# Altium PCB PCB1.PcbDoc (part 4 of 5)
Units mm, origin at the board's own origin, x right, y up, seen from the top; angles counter-clockwise.
Board outline 160 x 110 mm, 4 copper layers (Top Layer, Power Layer, GND Layer, Bottom Layer), stack 1.714 mm thick; 504 components, 362 nets, 1765 pads, 999 vias.
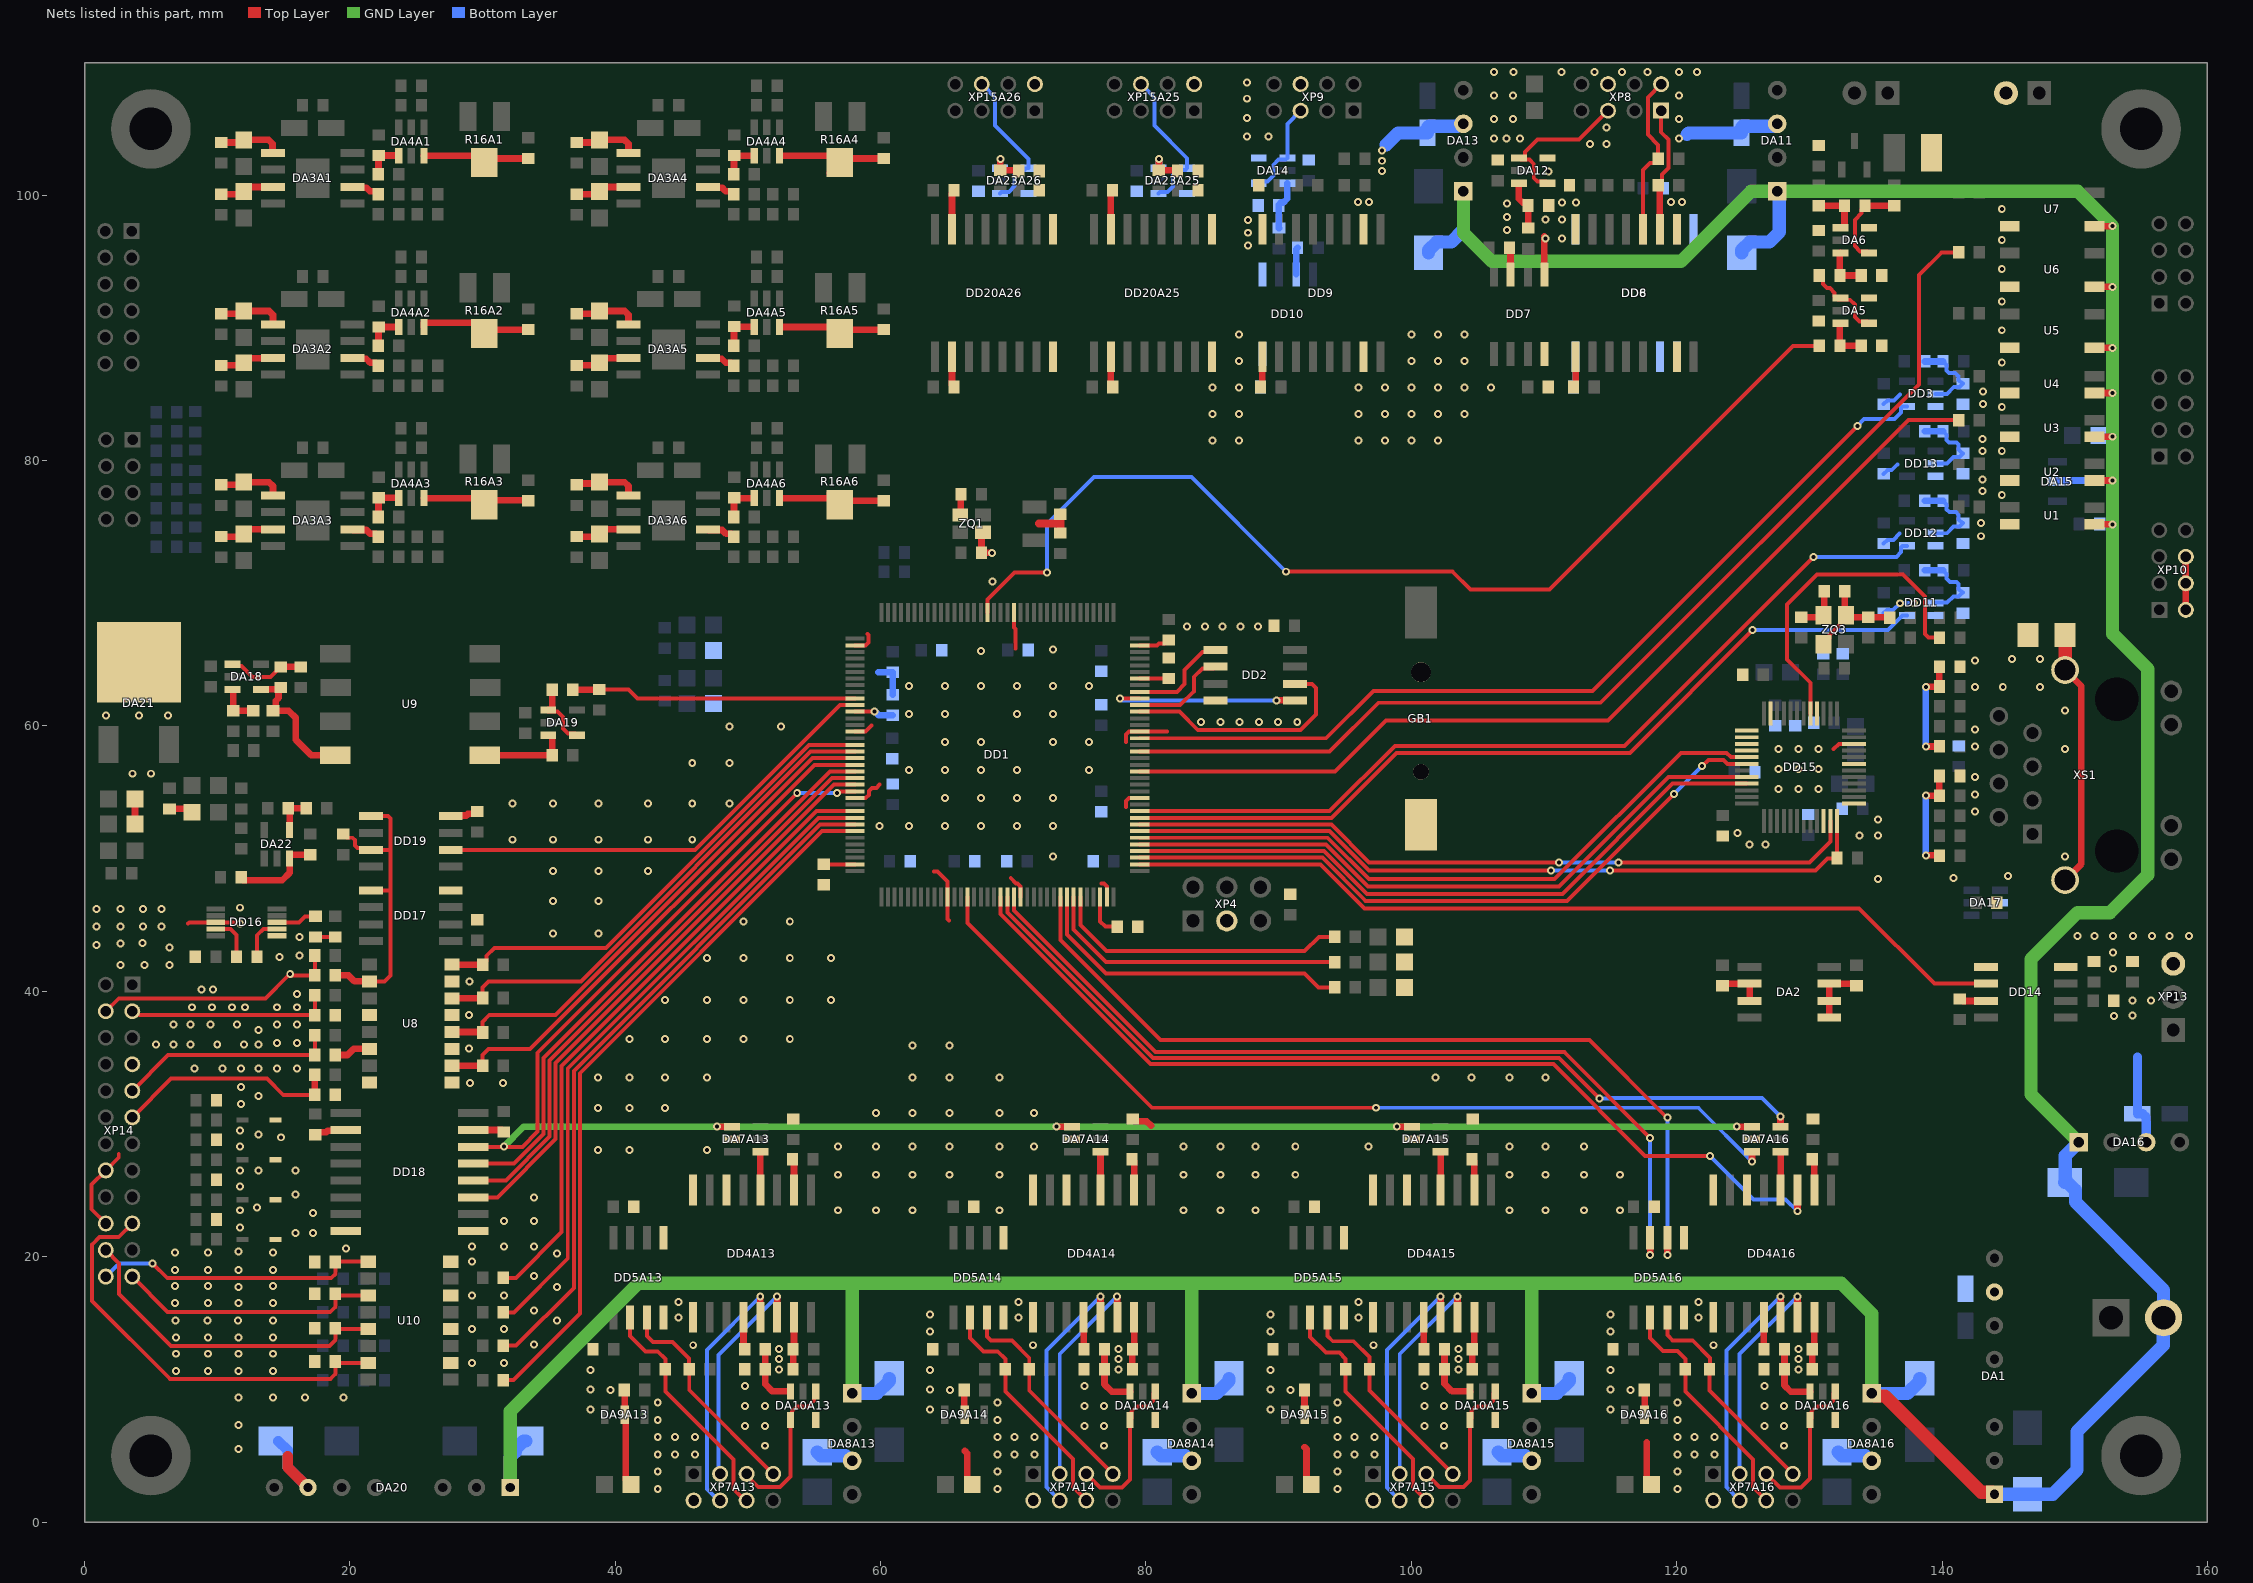
[diagram p5: the nets of this part, all layers, seen from the top]

## Via types
v1: diameter 0.6, hole 0.3, Top Layer to Bottom Layer, tented both sides, 927 vias
v2: diameter 0.6, hole 0.3, Top Layer to Bottom Layer, 72 vias

## Nets (pads, with @x,y where several pads share a name; then routed paths per layer and width w, separated by ;. In a path a pad name is that pad's centre, name@x,y a point inside that pad or via, vN(x,y) a via of type N, cw(c..) or ccw(c..) an arc to the next point about the centre after c; other vN are vias at no path point) (continued)
DRV4_DIG_MOD: DA7A16.3 DD1.86 | length 69.3
  Top Layer w0.3: DD1.86@66.55,47.1 66.55,45.136 80.461,31.225 v1(97.35,31.225)
  Top Layer w0.5: v1(125.675,27.175) DA7A16.3@125.675,27.9
  Bottom Layer w0.3: v1(97.35,31.225) 121.625,31.225 v1(125.675,27.175)
DRV4_ERR1: DD1.93 DD5A16.7 | length 66.2
  Top Layer w0.3: DD1.93@70.05,47.1 70.05,46.091 80.716,35.425 111.525,35.425 v1(118,28.95)
  Top Layer w0.5: v1(118,20.125) DD5A16.7@118,21.425
  Bottom Layer w0.3: v1(118,20.125) v1(118,28.95)
DRV4_ERR2: DD1.100 DD5A16.6 | length 66.2
  Top Layer w0.3: DD1.100@73.55,47.1 73.55,43.864 81.089,36.325 113.425,36.325 119.25,30.5 v1(119.3,30.5)
  Top Layer w0.5: v1(119.3,20.125) DD5A16.6@119.3,21.425
  Bottom Layer w0.3: v1(119.3,20.125) v1(119.3,30.5)
DRV4_ON: DD1.91 DD4A16.3 | length 72.2
  Top Layer w0.3: DD1.91@69.05,47.1 69.05,45.818 80.343,34.525 110.7,34.525 117.625,27.6 v1(122.5,27.6)
  Top Layer w0.5: v1(129.1,23.425) 129.103,23.427 129.103,25.023 DD4A16.3@129.105,25.025
  Bottom Layer w0.3: v1(122.5,27.6) 125.775,24.325 128.2,24.325 v1(129.1,23.425)
DRV4_SEL_MOD: DA7A16.6 DD1.92 | length 66.6
  Top Layer w0.3: DD1.92@69.55,47.1 69.55,45.955 80.53,34.975 111.126,34.975 v1(114.188,31.913)
  Top Layer w0.5: DA7A16.6@127.825,29.8 v1(127.825,30.575)
  Bottom Layer w0.3: v1(114.188,31.913) 115.026,31.913 115.088,31.975 126.425,31.975 v1(127.825,30.575)
EMER_BUT: DD1.117 DD11.4 | length 64.1
  Top Layer w0.3: DD1.117@79.525,53.075 93.975,53.075 98.875,57.975 116.475,57.975 v1(125.725,67.225)
  Bottom Layer w0.3: v1(125.725,67.225) 135.925,67.225 137.025,68.325 DD11.4@137.35,68.325
EMIS_COL: DD1.127 R51.2 | length 82.1
  Top Layer w0.3: DD1.127@79.525,58.075 93.848,58.075 97.523,61.75 114.266,61.75 138.254,85.738 138.254,93.979 139.975,95.7 R51.2@141.25,95.7
EMIS_IND: DD1.124 R48.2 | length 72.7
  Top Layer w0.3: DD1.124@79.525,56.575 94.257,56.575 98.082,60.4 114.836,60.4 137.486,83.05 R48.2@141.25,83.05
ETH_CS: DD1.114 DD15.29 | length 51.1
  Top Layer w0.3: DD1.114@79.525,51.575 93.696,51.575 96.821,48.45 110.8,48.45 120.325,57.975 123.75,57.975 124.075,57.65 DD15.29@125.275,57.65
ETH_INT: DD1.116 DD15.47 | length 55.4
  Top Layer w0.3: DD1.116@79.525,52.575 93.975,52.575 96.825,49.725 v1(111.125,49.725) ; v1(115.6,49.725) 130.025,49.725 131.575,51.275 DD15.47@131.575,52.85
  Bottom Layer w0.3: v1(111.125,49.725) v1(115.6,49.725)
ETH_MISO: DD1.112 DD15.33 | length 50.5
  Top Layer w0.3: DD1.112@79.525,50.575 93.423,50.575 96.648,47.35 111.4,47.35 119.7,55.65 DD15.33@125.275,55.65
ETH_MOSI: DD1.113 DD15.32 | length 50.5
  Top Layer w0.3: DD1.113@79.525,51.075 93.559,51.075 96.734,47.9 111.125,47.9 119.375,56.15 DD15.32@125.275,56.15
ETH_RST: DD1.115 DD15.48 R68.1 | length 57
  Top Layer w0.3: DD1.115@79.525,52.075 93.839,52.075 96.814,49.1 v1(110.525,49.1) ; v1(114.988,49.113) 130.463,49.113 131.376,50.026 132.051,50.026 R68.1@132.075,50.05 132.075,52.1 DD15.48@132.075,52.85
  Bottom Layer w0.3: v1(110.525,49.1) v1@114.975,49.1
ETH_SCLK: DD1.111 DD15.30 | length 51.6
  Top Layer w0.3: DD1.111@79.525,50.075 93.286,50.075 96.561,46.8 111.725,46.8 v1(119.8,54.875) ; v1(121.912,56.975) 122.387,57.45 123.524,57.45 123.824,57.15 DD15.30@125.275,57.15
  Bottom Layer w0.3: v1(119.8,54.875) 119.813,54.875 v1(121.912,56.975)
EXT_AN_MOD: C113.1 DD1.46 R95.2 | length 21.5
  Top Layer w0.3: C113.1@38.8,62.75 41,62.75 41.675,62.075 DD1.46@58.075,62.075
  Top Layer w0.5: R95.2@36.8,62.725 C113.1@38.775,62.725
EXT_COM1: DD1.57 DD18.13 | length 44.4
  Top Layer w0.3: DD18.13@29.3,27.01 32.377,27.01 34.601,29.234 34.601,34.976 56.2,56.575 DD1.57@58.075,56.575
EXT_COM2: DD1.58 DD18.12 | length 44.7
  Top Layer w0.3: DD18.12@29.3,25.74 31.749,25.74 35.055,29.046 35.055,34.794 56.336,56.075 DD1.58@58.075,56.075
EXT_COM3: DD1.59 DD18.11 | length 45
  Top Layer w0.3: DD18.11@29.3,24.47 31.121,24.47 35.509,28.858 35.509,34.584 56.5,55.575 DD1.59@58.075,55.575
EXT_DIG_MOD: DA7A13.1 DA7A14.1 DA7A15.1 DA7A16.1 DD1.60 DD18.14 | length 141.5
  Top Layer w0.3: DD18.14@29.3,28.28 33.005,28.28 34.147,29.422 34.147,35.371 v1(53.713,54.937) ; v1(56.712,54.938) 56.793,54.938 56.93,55.075 DD1.60@58.075,55.075
  Top Layer w0.5: v1(47.65,29.8) DA7A13.1@48.8,29.8 ; v1(73.25,29.8) DA7A14.1@74.425,29.8 ; v1(98.9,29.8) DA7A15.1@100.05,29.8 ; v1(124.525,29.8) DA7A16.1@125.675,29.8
  GND Layer w0.5: v1(31.6,28.3) 33.1,29.8 v1(124.525,29.8)
  Bottom Layer w0.3: v1(53.713,54.937) v1(56.712,54.938)
EXT_FLAG1: DD1.66 R96.2 | length 54.3
  Top Layer w0.3: R96.2@31.55,10.7 32.325,10.7 37.325,15.7 37.325,33.825 55.575,52.075 DD1.66@58.075,52.075
EXT_FLAG2: DD1.65 R97.2 | length 52.4
  Top Layer w0.3: R97.2@31.55,13.3 32.525,13.3 36.871,17.646 36.871,34.007 55.439,52.575 DD1.65@58.075,52.575
EXT_FLAG3: DD1.64 R98.2 | length 50.4
  Top Layer w0.3: R98.2@31.55,15.8 32.356,15.8 36.417,19.861 36.417,34.19 55.302,53.075 DD1.64@58.075,53.075
EXT_FLAG4: DD1.63 R99.2 | length 48.4
  Top Layer w0.3: R99.2@31.55,18.4 32.5,18.4 35.963,21.863 35.963,34.372 55.166,53.575 DD1.63@58.075,53.575
EXT_IL1: DD1.53 R89.2 U8.16 | length 37.5
  Top Layer w0.3: U8.16@27.7,42.01 U8.16@27.71,42 ; R89.2@30,42 30.275,42.275 30.275,42.65 30.906,43.281 39.3,43.281 54.594,58.575 DD1.53@58.075,58.575
  Top Layer w0.5: U8.16@27.71,42 R89.2@30,42
EXT_IL2: DD1.54 R91.2 U8.14 | length 38.6
  Top Layer w0.3: R91.2@29.97,39.47 R91.2@30,39.5 30,40.3 30.45,40.75 37.405,40.75 54.73,58.075 DD1.54@58.075,58.075
  Top Layer w0.5: U8.14@27.7,39.47 R91.2@29.97,39.47
EXT_KEY: DD1.55 R92.2 U8.12 | length 39.4
  Top Layer w0.3: R92.2@29.97,36.93 R92.2@30,36.9 30,37.7 30.5,38.2 35.492,38.2 54.867,57.575 DD1.55@58.075,57.575
  Top Layer w0.5: U8.12@27.7,36.93 R92.2@29.97,36.93
EXT_MP_EN: DD1.56 R93.2 U8.10 | length 40.2
  Top Layer w0.3: R93.2@29.99,34.39 R93.2@30,34.4 30,35.2 30.45,35.65 33.578,35.65 55.003,57.075 DD1.56@58.075,57.075
  Top Layer w0.5: U8.10@27.7,34.39 R93.2@29.99,34.39
EXT_PMO: DD1.47 DD19.2 | length 35
  Top Layer w0.3: DD19.2@27.6,50.65 46.025,50.65 56.95,61.575 DD1.47@58.075,61.575
FIBER_IL: DD1.129 DD3.4 | length 68.4
  Top Layer w0.3: DD1.129@79.525,59.075 93.575,59.075 97.15,62.65 113.65,62.65 v1(133.625,82.625)
  Bottom Layer w0.3: v1(133.625,82.625) 134.125,83.125 136.4,83.125 136.9,83.625 136.9,83.95 137.025,84.075 DD3.4@137.35,84.075
FLAG1_HW: R112.2 U10.15 XP14.19 | length 32.3
  Top Layer w0.3: XP14.19@3.6,22.5 2.575,21.475 1.125,21.475 0.55,20.9 0.55,16.675 6.427,10.798 18.523,10.798 18.9,11.175 R112.2@18.9,12.1 19,12 U10.15@21.38,12
FLAG2_HW: R113.2 U10.13 XP14.22 | length 25.2
  Top Layer w0.3: XP14.22@1.6,20.5 2.6,19.5 2.6,17.2 6.516,13.284 18.459,13.284 18.9,13.725 R113.2@18.9,14.6 18.96,14.54 U10.13@21.38,14.54
FLAG3_HW: R115.2 U10.11 XP14.23 | length 19.9
  Top Layer w0.3: XP14.23@3.6,18.5 6.26,15.84 18.515,15.84 18.9,16.225 R115.2@18.9,17.08 ; R115.2@18.9,17.2 19.02,17.08 U10.11@21.38,17.08
FLAG4_HW: R116.2 U10.9 XP14.24 | length 21.7
  Top Layer w0.3: v1(5.125,19.5) 6.25,18.375 18.575,18.375 18.9,18.7 R116.2@18.9,19.6 ; R116.2@18.92,19.62 U10.9@21.38,19.62
  Bottom Layer w0.3: XP14.24@1.6,18.5 2.6,19.5 v1(5.125,19.5)
FLOW: DD1.110 DD14.6 | length 67.5
  Top Layer w0.3: DD1.110@79.525,49.575 93.15,49.575 96.475,46.25 133.75,46.25 139.425,40.575 DD14.6@143.325,40.575
GND: C2.2 C4.2 C5.2 C6.2 C7.2 C9.2 C10.1 C12.2 C13.2 C15.2 C16.1 C17.2 C18.2 C19.2 C20.2 C21.1 C22.1 C23.1 C24.2 C25.2 C26.1 C27.2 C28.2 C38.2 C39.2 C40.2 C42.2 C43.2 C45A13.2 C45A14.2 C45A15.2 C45A16.2 C46A13.2 C46A14.2 C46A15.2 C46A16.2 C47A13.2 C47A14.2 C47A15.2 C47A16.2 C56.2 C57.2 C58.2 C66.2 C67.2 C75.2 C76.2 C77.2 C78.2 C79.2 C80.2 C85.2 C86.2 C87.2 C88.2 C89.2 C90.2 C91.2 C92.2 C93.2 C94.2 C95.2 C96.2 C97.2 C98.2 C99.2 C100.2 C101.2 C102.2 C110.2 C111.2 C114.2 C124A25.2 C124A26.2 DA1.7 DA2.2 DA2.3 DA2.5 DA2.6 DA2.7 DA5.5 DA6.5 DA7A13.2 DA7A14.2 DA7A15.2 DA7A16.2 DA17.2 DD1.16 DD1.38 DD1.51 DD1.61 DD1.83 DD1.94 DD1.107 DD1.120 DD1.130 DD2.4 DD3.3 DD4A13.2 DD4A13.6 DD4A13.8 DD4A14.2 DD4A14.6 DD4A14.8 DD4A15.2 DD4A15.6 DD4A15.8 DD4A16.2 DD4A16.6 DD4A16.8 DD5A13.5 DD5A14.5 DD5A15.5 DD5A16.5 DD6.9 DD6.15 DD7.4 DD8.2 DD8.3 DD8.8 DD9.9 DD9.15 DD10.4 DD11.3 DD12.3 DD13.3 DD14.5 DD14.7 DD15.1 DD15.7 DD15.10 DD15.16 DD15.23 DD15.25 DD15.26 DD15.27 DD15.28 DD15.46 DD17.4 DD18.9 DD18.15 DD19.4 DD20A25.2 DD20A25.8 DD20A26.2 DD20A26.8 GB1.1 R1.1 R2.1 R3.2 R7.2 R21.2 R24.1 R25.1 R64.1 U1.2 U2.2 U3.2 U4.2 U5.3 U6.3 U7.3 U8.9 U8.11 U8.13 U8.15 U10.2 U10.4 U10.6 U10.8 VD1.2 VD2.2 VD3.2 XP4.3 XP6.2 XP10.2 XP10.4 XP10.6 ZQ1.2 ZQ1.4 ZQ3.2 ZQ3.4 | length 88.9
  Top Layer w0.3: DD1.61@58.075,54.575 58.874,54.575 59.113,54.813 59.113,55.087 59.351,55.325 59.675,55.325 59.925,55.575 ; DD1.51@58.075,59.575 58.874,59.575 59.325,60.026 59.325,60.05 ; DD1.38@58.075,66.075 58.874,66.075 59.1,66.301 59.1,66.849 59.012,66.937 ; 64.002,49.025 64.299,49.025 65.05,48.274 DD1.83@65.05,47.1 65.05,45.45 65.15,45.35 ; ZQ1.4@66,75.9 ZQ1.4@66.05,75.95 ; ZQ1.2@67.6,74.5 ZQ1.2@67.7,74.6 ; 69.806,48.529 70.21,48.125 70.324,48.125 70.55,47.899 DD1.94@70.55,47.1 ; DD1.16@70.05,68.55 70.05,67.424 70.15,67.324 70.15,65.825 ; 76.65,48.125 76.824,48.125 77.05,47.899 DD1.107@77.05,47.1 ; 78.5,53.9 78.5,54.349 78.726,54.575 DD1.120@79.525,54.575 ; 78.5,58.775 78.5,59.349 78.726,59.575 DD1.130@79.525,59.575 81.6,59.575 ; ZQ3.4@131.05,66.15 131.5,66.6 131.5,66.85 132.3,67.65 132.3,67.9 ZQ3.2@132.75,68.35 ; 131.825,58.25 132.225,58.65 DD15.10@133.375,58.65 ; ZQ3.2@132.675,68.425 ZQ3.2@132.75,68.35 ; ZQ3.2@132.9,68.2 ZQ3.2@132.75,68.35 ; R64.1@136.012,68.2 R64.1@136.05,68.162
  Top Layer w0.5: DD19.4@27.6,53.2 27.65,53.25 28.775,53.25 28.9,53.375 29.425,53.375 C114.2@29.6,53.55 ; DD18.15@29.3,29.55 31.45,29.55 C111.2@31.6,29.4 ; C46A13.2@53.225,27.2 53.395,27.2 53.47,27.125 DD4A13.2@53.47,25.025 ; DD20A26.2@65.38,87.825 65.38,85.695 C124A26.2@65.525,85.55 ; ZQ1.4@66.05,75.95 C12.2@66.05,77.45 ; ZQ1.2@67.6,74.5 C6.2@67.6,73.05 v1(68.4,73.05) ; DD20A25.2@77.345,87.825 77.345,85.705 C124A25.2@77.5,85.55 ; C46A14.2@78.95,27.35 79.105,27.195 DD4A14.2@79.105,25.025 ; C45A14.2@79,30.375 79.175,30.2 80.05,30.2 80.375,29.875 ; C67.2@88.625,85.55 88.77,85.695 DD9.9@88.77,87.828 ; C46A15.2@104.575,27.35 104.745,27.18 DD4A15.2@104.745,25.025 ; C57.2@112.225,85.55 112.385,85.71 DD6.9@112.385,87.828 ; C9.2@123.45,40.425 123.601,40.576 DA2.2@125.5,40.576 DA2.3@125.5,39.276 ; C46A16.2@130.225,27.35 130.375,27.2 DD4A16.2@130.375,25.025 ; DA2.5@131.5,38.026 DA2.6@131.5,39.276 DA2.7@131.5,40.576 133.474,40.576 C4.2@133.575,40.475 ; ZQ3.2@132.675,68.425 C94.2@132.675,70.15 ; ZQ3.2@132.9,68.2 C92.2@134.45,68.2 R64.1@136.012,68.2 ; C85.2@141.325,39.55 141.6,39.275 DD14.7@143.325,39.275 ; XP10.2@158.375,68.75 XP10.4@158.375,70.75 XP10.6@158.375,72.75
  Top Layer w0.6: 71.925,75.25 73.55,75.25 ; C7.2@73.55,74.55 73.55,75.25 ; C13.2@73.55,75.95 73.55,75.25
  Bottom Layer w0.3: C78.2@135.6,68.5 135.831,68.731 136.306,68.731 136.85,69.275 137.525,69.275 ; C79.2@135.6,73.75 135.875,74.025 136.325,74.025 136.8,74.5 ; C80.2@135.6,79 135.875,79.275 136.175,79.275 136.625,79.725 ; C43.2@135.6,84.25 135.875,84.525 136.375,84.525 136.825,84.975
  Bottom Layer w0.5: 59.825,64.05 C19.2@60.9,64.05 R3.2@60.9,62.35 ; C58.2@112.245,85.55 112.385,85.69 DD8.8@112.385,87.828
  other v1: 29.2,12 31.6,12 33.875,13.375 29.2,14.54 31.6,14.55 35.6,15.2 33.875,15.95 31.6,17.075 29.2,17.08 35.6,17.7 33.875,18.55 29.2,19.62 35.6,20.25 29.2,20.75 31.6,20.75 33.875,20.75 31.6,22.675 33.875,22.675 56.8,23.5 59.65,23.5 62.4,23.5 68.975,23.5 82.825,23.5 85.6,23.5 88.25,23.5 107.4,23.5 110.1,23.5 113,23.5 115.725,23.5 33.875,24.45 56.8,26.175 59.65,26.175 62.4,26.175 65.2,26.175 68.975,26.175 82.825,26.175 85.6,26.175 88.25,26.175 91.25,26.175 107.4,26.175 110.1,26.175 113,26.175 115.725,26.175 38.7,28.05 41.075,28.05 46.925,28.05 56.8,28.3 59.65,28.3 62.4,28.3 65.2,28.3 68.975,28.3 71.55,28.3 82.825,28.3 85.6,28.3 88.25,28.3 91.25,28.3 96.775,28.3 107.4,28.3 110.1,28.3 113,28.3 59.65,30.825 62.4,30.825 65.2,30.825 68.975,30.825 71.55,30.825 38.7,31.2 41.075,31.2 43.75,31.2 29.05,33.1 31.525,33.1 38.7,33.5 41.075,33.5 43.75,33.5 46.925,33.5 62.4,33.5 65.2,33.5 68.975,33.5 101.825,33.5 104.55,33.5 107.4,33.5 110.1,33.5 28.975,35.675 62.4,35.9 65.2,35.9 41.075,36.4 43.75,36.4 46.925,36.4 49.675,36.4 53.15,36.4 28.975,38.2 43.75,39.35 46.925,39.35 49.675,39.35 53.15,39.35 56.25,39.35 29,40.725 46.925,42.5 49.675,42.5 53.15,42.5 56.25,42.5 35.3,44.375 38.75,44.375 49.675,45.25 53.15,45.25 35.3,46.8 38.75,46.8 135.175,48.45 140.875,48.55 144.975,48.7 35.3,49.075 38.75,49.075 42.45,49.075 72.985,50.175 149.275,50.15 125.475,51.05 126.675,51.05 32.25,51.425 35.3,51.425 38.75,51.425 42.45,51.425 45.8,51.425 133.775,51.75 135.175,51.75 124.575,51.95 59.9,52.475 62.125,52.475 64.84,52.475 67.555,52.475 70.27,52.475 72.985,52.475 135.175,52.95 142.475,53.55 32.25,54.15 35.3,54.15 38.75,54.15 42.45,54.15 45.8,54.15 48.6,54.15 64.84,54.58 67.555,54.58 70.27,54.58 72.985,54.58 142.475,54.85 127.675,55.25 129.175,55.25 130.675,55.25 142.475,56.15 62.125,56.685 64.84,56.685 67.555,56.685 70.27,56.685 75.7,56.685 127.675,56.75 129.175,56.75 130.675,56.75 45.8,57.225 48.6,57.225 127.675,58.25 129.175,58.25 130.675,58.25 149.275,58.25 142.475,58.45 64.84,58.79 67.555,58.79 72.985,58.79 75.7,58.79 142.475,59.75 48.6,59.975 52.475,59.975 84.15,60.3 85.6,60.3 87.05,60.3 88.5,60.3 89.95,60.3 91.4,60.3 62.125,60.895 64.84,60.895 70.27,60.895 72.985,60.895 149.275,61.15 142.475,62.95 144.575,62.95 147.375,62.95 62.125,63 64.84,63 67.555,63 70.27,63 72.985,63 75.7,63 142.475,64.95 145.275,65.05 147.375,65.05 67.555,65.65 72.985,65.75 83.1,67.5 84.437,67.5 85.775,67.5 87.113,67.5 88.45,67.5 136.825,69.25 137.875,69.25 68.425,70.9 142.95,74.3 142.925,75.3 144.5,77.425 143.05,77.7 143.05,78.575 143.05,80.725 144.5,80.725 85,81.5 87,81.5 96,81.5 98,81.5 100,81.5 102,81.5 143.05,81.625 85,83.5 87,83.5 96,83.5 98,83.5 100,83.5 102,83.5 104,83.5 144.5,84.025 143.075,84.25 143.1,85.225 85,85.5 87,85.5 96,85.5 98,85.5 100,85.5 102,85.5 104,85.5 106,85.5 144.5,87.4 87,87.5 100,87.5 102,87.5 104,87.5 87,89.5 100,89.5 102,89.5 104,89.5 144.5,89.825 144.5,92 144.5,94.425 144.5,96.625 144.5,98.975
GND_24V: C1.2 C44A13.2 C44A14.2 C44A15.2 C44A16.2 C55.2 C65.2 C73.1 C74.2 C81.2 C115.2 DA1.1 DA8A13.1 DA8A14.1 DA8A15.1 DA8A16.1 DA11.1 DA13.1 DA15.2 DA16.1 DA20.1 U1.3 U2.3 U3.3 U4.3 U5.4 U6.4 U7.4 XP3.2 | length 374.9
  Top Layer w0.5: U1.3@151.5,75.2 v1(152.85,75.2) ; U2.3@151.5,78.5 v1(152.85,78.5) ; U3.3@151.5,81.8 v1(152.85,81.8) ; U4.3@151.5,85.1 v1(152.85,85.1) ; U5.4@151.5,88.5 v1(152.85,88.5) ; U6.4@151.5,93.1 v1(152.85,93.1) ; U7.4@151.5,97.675 v1(152.85,97.675)
  Top Layer w1: DA8A16.1@134.7,9.695 134.9,9.495 135.705,9.495 142.95,2.25 143.8,2.25 DA1.1@143.95,2.1
  GND Layer w1: DA20.1@32.08,2.6 32.08,8.355 41.725,18 57.85,18 ; DA8A13.1@57.85,9.695 57.85,18 ; DA8A14.1@83.45,9.695 83.45,18 ; DA13.1@103.925,100.305 103.925,97.175 106.075,95.025 120.325,95.025 125.605,100.305 DA11.1@127.575,100.305 150.22,100.305 v1(152.85,97.675) v1(152.85,93.1) v1(152.85,88.5) v1(152.85,85.1) v1(152.85,81.8) v1(152.85,78.5) v1(152.85,75.2) 152.85,66.95 155.5,64.3 155.5,48.775 152.65,45.925 150.2,45.925 146.7,42.425 146.7,32.23 DA16.1@150.305,28.625 ; DA8A15.1@109.075,9.695 109.075,18 ; DA8A16.1@134.7,9.695 134.7,15.7 132.4,18 109.075,18 ; 57.85,18 83.45,18 ; 83.45,18 109.075,18
  Bottom Layer w0.2: DA15.2@148.7,78.425 DA15.2@148.775,78.5
  Bottom Layer w0.5: DA15.2@148.775,78.5 v1(152.85,78.5) ; C73.1@151.815,81.9 151.896,81.819 152.831,81.819 v1(152.85,81.8) ; C74.2@151.875,75.225 151.888,75.212 152.837,75.212 v1(152.85,75.2)
  Bottom Layer w1: DA20.1@32.08,2.6 32.08,4.905 32.475,5.3 32.475,5.5 33.075,6.1 C115.2@33.275,6.1 ; DA8A13.1@57.85,9.695 59.72,9.695 60.65,10.625 C44A13.2@60.65,10.825 ; DA8A14.1@83.45,9.695 85.32,9.695 86.25,10.625 C44A14.2@86.25,10.825 ; C65.2@101.3,95.675 101.3,95.875 101.9,96.475 103,96.475 103.925,97.4 DA13.1@103.925,100.305 ; DA8A15.1@109.075,9.695 110.97,9.695 111.9,10.625 C44A15.2@111.9,10.825 ; C55.2@124.9,95.675 124.9,95.875 125.5,96.475 126.975,96.475 127.725,97.225 127.725,100.155 DA11.1@127.575,100.305 ; DA8A16.1@134.7,9.695 137.395,9.695 138.325,10.625 C44A16.2@138.325,10.825 ; DA1.1@143.95,2.1 C1.2@146.45,2.1 148.35,2.1 150.175,3.925 150.175,6.825 156.674,13.324 156.674,15.374 XP3.2@156.7,15.4 ; DA16.1@150.305,28.625 149.294,27.614 149.294,25.644 C81.2@149.25,25.6 149.45,25.6 150.05,25 150.05,24.125 156.687,17.488 XP3.2@156.687,15.413
GND_DRVA13: C48A13.2 C49A13.2 C50A13.2 C51A13.1 C52A13.2 C53A13.2 C54A13.2 DA8A13.3 DA9A13.2 DA10A13.5 DD4A13.9 DD4A13.15 DD5A13.4 XP7A13.2 | length 14.1
  Top Layer w0.5: C54A13.2@40.7,9.925 DA9A13.2@40.7,8.075 40.775,8 40.775,3.503 40.79,3.488 40.79,3.21 C51A13.1@41.175,2.825 ; C53A13.2@53.4,11.525 C49A13.2@53.4,13.025 53.47,13.095 DD4A13.15@53.47,15.425
  Bottom Layer w1: C48A13.2@55.225,5.275 55.495,5.005 57.351,5.005 57.742,4.615 DA8A13.3@57.85,4.615
  other v1: 43.2,2.5 43.2,3.8 43.2,5.1 44.5,5.1 46,5.1 51.275,5.75 43.2,6.4 44.5,6.4 46,6.4 49.775,7.25 51.275,7.25 43.2,7.7 38.125,8.475 49.775,8.75 51.275,8.75 43.2,9 39.625,9.95 38.125,9.975 49.775,10.25 38.125,11.475 52.35,11.5 52.35,12.275 52.35,13.025 45.875,13.325 44.75,15.425 44.75,16.575
GND_DRVA14: C48A14.2 C49A14.2 C50A14.2 C51A14.1 C52A14.2 C53A14.2 C54A14.2 DA8A14.3 DA9A14.2 DA10A14.5 DD4A14.9 DD4A14.15 DD5A14.4 XP7A14.2 | length 11.5
  Top Layer w0.5: C54A14.2@66.3,9.95 66.313,9.937 66.313,8.087 DA9A14.2@66.325,8.075 ; 66.35,5.35 66.525,5.175 66.525,3.2 C51A14.1@66.9,2.825 ; C53A14.2@78.975,11.525 C49A14.2@78.975,13.025 79.105,13.155 DD4A14.15@79.105,15.425
  Bottom Layer w1: C48A14.2@80.85,5.275 81.132,4.993 82.964,4.993 83.342,4.615 DA8A14.3@83.45,4.615
  other v1: 68.8,2.5 68.8,3.8 68.8,5.1 70.1,5.1 71.6,5.1 76.85,5.75 68.8,6.4 70.1,6.4 71.6,6.4 75.35,7.25 76.85,7.25 68.8,7.7 63.725,8.475 75.35,8.75 76.85,8.75 68.8,9 65.225,9.95 63.725,9.975 75.35,10.25 63.725,11.475 77.925,11.5 77.925,12.275 77.925,13.025 71.5,13.325 63.725,14.35 70.375,15.425 63.725,15.65 70.375,16.575
GND_DRVA15: C48A15.2 C49A15.2 C50A15.2 C51A15.1 C52A15.2 C53A15.2 C54A15.2 DA8A15.3 DA9A15.2 DA10A15.5 DD4A15.9 DD4A15.15 DD5A15.4 XP7A15.2 | length 11.7
  Top Layer w0.5: 91.95,5.65 92.1,5.5 92.1,3.175 C51A15.1@92.45,2.825 ; DA9A15.2@91.95,8.075 C54A15.2@91.95,9.95 ; C53A15.2@104.6,11.525 C49A15.2@104.6,13.025 104.745,13.17 DD4A15.15@104.745,15.425
  Bottom Layer w1: C48A15.2@106.55,5.275 106.82,5.005 108.576,5.005 108.967,4.615 DA8A15.3@109.075,4.615
  other v1: 94.425,2.5 94.425,3.8 94.425,5.1 95.725,5.1 97.225,5.1 102.475,5.75 94.425,6.4 95.725,6.4 97.225,6.4 100.975,7.25 102.475,7.25 94.425,7.7 89.375,8.475 100.975,8.75 102.475,8.75 94.425,9 90.875,9.95 89.375,9.975 100.975,10.25 89.375,11.475 103.55,11.5 103.55,12.275 103.55,13.025 97.15,13.325 89.375,14.35 96.025,15.425 89.375,15.65 96.025,16.575
GND_DRVA16: C48A16.2 C49A16.2 C50A16.2 C51A16.1 C52A16.2 C53A16.2 C54A16.2 DA8A16.3 DA9A16.2 DA10A16.5 DD4A16.9 DD4A16.15 DD5A16.4 XP7A16.2 | length 12
  Top Layer w0.5: C54A16.2@117.55,9.95 117.6,9.9 DA9A16.2@117.6,8.075 ; 117.75,5.998 117.75,3.175 C51A16.1@118.1,2.825 ; C53A16.2@130.225,11.525 C49A16.2@130.225,13.025 130.375,13.175 DD4A16.15@130.375,15.425
  Bottom Layer w1: C48A16.2@132.175,5.275 132.445,5.005 134.201,5.005 134.592,4.615 DA8A16.3@134.7,4.615
  other v1: 120.05,2.5 120.05,3.8 120.05,5.1 121.35,5.1 122.85,5.1 128.1,5.75 120.05,6.4 121.35,6.4 122.85,6.4 126.6,7.25 128.1,7.25 120.05,7.7 115,8.475 126.6,8.75 128.1,8.75 120.05,9 116.5,9.95 115,9.975 126.6,10.25 115,11.475 129.175,11.5 129.175,12.275 129.175,13.025 122.775,13.325 115,14.35 121.65,15.425 115,15.65 121.65,16.575
GND_FS: C82.2 C83.2 C84.2 DA16.3 DD14.4 R53.2 XP13.3 | length 6.9
  Bottom Layer w0.7: 154.725,35.046 C84.2@154.725,30.775 155.125,30.775 155.375,30.525 155.375,30.125 155.385,30.115 DA16.3@155.385,28.625
  other v1: 152.95,38.125 154.35,38.175 154.35,39.3 155.75,39.3 152.875,41.7 152.875,42.925 150.2,44.175 151.5,44.175 152.875,44.175 154.375,44.175 155.825,44.175 157.125,44.175 158.625,44.175
GND_HW: C103.2 C104.2 C108.2 C109.2 C116.1 C117.2 C118.2 C119.2 DA20.7 DA21.2 DD16.1 DD16.8 DD17.5 DD18.2 DD18.8 DD19.5 DD19.7 R69.1 R70.1 R72.1 R73.1 R75.1 R76.1 R77.1 R79.1 R109.1 R111.1 R112.1 R113.1 R115.1 R116.1 U8.2 U8.4 U8.6 U8.8 VD4.2 VD5.2 VD6.2 VD7.2 XP14.7 XP14.16 XP14.20 | length 52.1
  Top Layer w0.3: XP14.20@1.6,22.5 0.525,23.575 0.525,25.425 XP14.16@1.6,26.5 2.575,27.475 2.575,27.725 ; 7.8,45.1 7.9,45.2 DD16.8@9.9,45.2 11.519,45.2 11.619,45.1 v1(11.7,45.1) ; C104.2@17.401,44.1 C108.2@18.9,44.1 ; C117.2@19.5,51.85 19.775,51.575 20.196,51.575 20.371,51.399 20.371,50.991 20.562,50.8 21.45,50.8 DD19.7@21.645,50.605 ; U8.2@21.48,40.74 22.59,40.74 23.055,41.205 23.055,47.625 ; DD17.5@21.6,47.6 23.03,47.6 23.055,47.625 ; DD19.5@21.6,53.2 22.879,53.2 23.055,53.024 23.055,50.655 ; DD19.7@21.605,50.655 23.055,50.655 ; 23.005,50.605 23.055,50.655 ; 23.055,47.625 23.055,50.655
  Top Layer w0.5: R111.1@3.8,52.6 C116.1@3.8,54.5 ; C118.2@6.4,53.75 7.85,53.75 R109.1@8.1,53.5 ; C109.2@17.4,29.2 17.575,29.375 18.225,29.375 18.35,29.5 19.65,29.5 DD18.2@19.7,29.55 ; R75.1@18.9,35.2 19.82,35.2 20.28,35.66 U8.6@21.48,35.66 ; R69.1@18.9,41.2 19.9,41.2 20.35,40.75 21.47,40.75 U8.2@21.48,40.74
  Top Layer w0.8: 15.325,4.95 15.325,4.115 DA20.7@16.84,2.6
  Bottom Layer w0.8: C119.2@14.6,6.1 15.3,5.4 15.3,4.14 DA20.7@16.84,2.6
  other v1: 11.6,5.5 11.6,7.3 11.6,9.4 14.2,9.4 16.6,9.4 19.5,9.4 6.874,11.4 9.3,11.4 11.6,11.4 14.2,11.4 6.874,12.684 9.3,12.684 11.6,12.684 14.2,12.684 6.874,13.9 9.3,13.9 11.6,13.9 14.2,13.9 6.85,15.175 9.275,15.175 11.55,15.175 14.2,15.175 6.8,16.5 9.3,16.5 11.6,16.5 14.2,16.5 11.6,17.7 6.8,17.775 9.3,17.775 14.2,17.775 6.8,19 9.3,19 11.6,19 14.2,19 6.8,20.3 9.3,20.3 14.2,20.3 11.6,20.4 19.7,20.6 15.9,21.8 17.2,21.8 11.7,22.2 17.2,23.3 11.7,23.5 13,23.7 15.9,24.7 11.7,25.3 11.7,26.5 13.1,26.5 15.9,26.5 11.7,28.3 14.8,29 13.1,29.2 11.7,29.5 11.8,31.5 13.1,32.1 11.8,32.8 8.3,34.2 10.4,34.2 11.8,34.2 13.1,34.2 14.5,34.2 16,34.2 5.4,36 6.7,36 8,36 10,36 12,36 13.1,36 14.5,36.1 16,36.1 13.1,37.1 6.7,37.5 8,37.5 9.5,37.5 11.5,37.5 14.5,37.5 16,37.5 8.1,38.8 9.6,38.8 11.1,38.8 12.1,38.8 14.5,38.8 16,38.8 16,39.8 8.8,40.15 9.675,40.15 2.7,42 4.5,42 6.4,42 14.7,42.6 16.2,42.7 6.4,43.3 0.9,43.5 2.7,43.6 4.362,43.638 16.2,44.1 0.9,44.9 2.7,44.9 4.4,44.9 5.8,44.9 0.9,46.2 2.7,46.2 4.4,46.2 5.8,46.2 11.7,46.3 3.6,56.4 5,56.4 1.6,60.8 4.1,60.8 6.3,60.8
GND_PS: C68.2 C69.2 C70.2 C71.2 C72.2 DA13.3 DA14.5 DD9.2 DD9.8 DD10.5 DD10.7 XP9.6 | length 8.7
  Bottom Layer w0.5: DD10.7@91.325,94.037 91.325,95.938 C70.2@91.425,96.038
  Bottom Layer w1: 98.107,103.807 99,104.7 C68.2@101.225,104.7 101.225,105.1 101.325,105.2 101.911,105.2 103.457,105.2 103.566,105.308 103.848,105.308 DA13.3@103.925,105.385
  other v1: 87.7,96.225 87.7,97.175 87.7,98.15 95.975,99.475 96.8,99.475 97.8,101.825 97.8,102.6 97.8,103.375 87.625,104.425 89.225,104.425 87.625,105.825 87.625,107.275 87.625,108.5
GND_PS_CAN: C59.2 C60.2 C61.2 C62.2 C63.2 C64.2 DA11.3 DA12.5 DD6.2 DD6.8 DD7.5 DD7.7 DD8.9 DD8.16 XP8.6 | length 12.2
  Top Layer w0.5: DD7.7@107.476,94.037 C61.2@107.476,95.962 ; DD7.5@110.026,94.037 v1@110.026,96.901
  Bottom Layer w1: 120.775,104.575 120.9,104.7 C59.2@124.875,104.7 124.875,105.1 124.975,105.2 127.282,105.2 127.467,105.385 DA11.3@127.575,105.385
  other v1: 110.1,96.75 111.35,96.75 107.2,97.375 110.1,98.175 111.35,98.175 107.2,98.375 107.2,99.375 111.35,99.45 112.4,99.45 119.575,99.5 120.4,99.5 110.35,101.8 113.45,103.875 114.725,103.875 106.225,104.275 107.175,104.275 108.175,104.275 120.175,104.275 114.725,105.1 106.225,105.75 107.675,105.75 120.175,105.75 106.225,107.525 107.675,107.525 120.175,107.525 106.225,109.3 107.7,109.3 111.325,109.3 113.8,109.3 115.875,109.3 117.8,109.3 120.175,109.3 121.525,109.3
GND_SFA25: C125A25.2 C126A25.2 C127A25.2 DA23A25.5 DD20A25.9 DD20A25.15 R118A25.1 XP15A25.2 | length 3
  Top Layer w0.5: DD20A25.15@77.345,97.425 77.345,100.245 C125A25.2@77.475,100.375
GND_SFA26: C125A26.2 C126A26.2 C127A26.2 DA23A26.5 DD20A26.9 DD20A26.15 R118A26.1 XP15A26.2 | length 3
  Top Layer w0.5: DD20A26.15@65.38,97.425 65.38,100.13 65.575,100.325 C125A26.2@65.575,100.375
GUIDE_LAS: DD1.20 R19.1 | length 80.8
  Top Layer w0.3: DD1.20@68.05,68.55 68.05,69.525 70.1,71.575 v1(72.55,71.575) ; v1(90.55,71.625) 103.1,71.625 104.45,70.275 110.4,70.275 128.775,88.65 R19.1@130.75,88.65
  Bottom Layer w0.3: v1(72.55,71.575) 72.55,75.225 76.075,78.75 83.425,78.75 v1(90.55,71.625)
IL1_HW: R69.2 R82.1 XP14.4 | length 18.4
  Top Layer w0.3: XP14.4@1.6,38.5 2.575,39.475 13.625,39.475 15.35,41.2 R69.2@17.35,41.2 R82.1@17.35,42.7
  other v1: 15.5,41.3
IL2_HW: R72.2 R83.1 XP14.3 | length 15.4
  Top Layer w0.3: XP14.3@3.6,38.5 3.844,38.5 4.144,38.2 R72.2@17.35,38.2 R83.1@17.35,39.7
KEY: DD1.118 DD12.4 | length 66.3
  Top Layer w0.3: DD1.118@79.525,53.575 93.839,53.575 98.764,58.5 116.05,58.5 v1(130.3,72.75)
  Bottom Layer w0.3: v1(130.3,72.75) 136.55,72.75 136.9,73.1 136.9,73.45 137.025,73.575 DD12.4@137.35,73.575
KEY_HW: R75.2 R84.1 XP14.9 | length 16.4
  Top Layer w0.3: XP14.9@3.6,32.5 6.3,35.2 R75.2@17.35,35.2 R84.1@17.35,36.7
LED1: DD1.101 R4.1 | length 24.6
  Top Layer w0.3: DD1.101@74.05,47.1 74.05,44.275 76.975,41.35 91.95,41.35 93,40.3 R4.1@94.225,40.3
LED2: DD1.102 R5.1 | length 23.1
  Top Layer w0.3: DD1.102@74.55,47.1 74.55,44.65 77,42.2 R5.1@94.2,42.2
LED3: DD1.103 R6.1 | length 22.5
  Top Layer w0.3: DD1.103@75.05,47.1 75.05,45 77.025,43.025 91.95,43.025 93.025,44.1 R6.1@94.225,44.1
LNKn: DD15.17 R63.2 | length 24.9
  Top Layer w0.3: DD15.17@130.075,60.95 130.075,63.257 128.325,65.007 128.325,69.15 130.575,71.4 137.05,71.4 138.7,69.75 138.7,66.925 138.963,66.662 R63.2@139.8,66.662
MEM_CS: DD1.136 DD2.1 | length 7.6
  Top Layer w0.3: DD1.136@79.525,62.575 82.325,62.575 82.9,63.15 82.9,64.225 84.25,65.575 85.075,65.575 DD2.1@85.225,65.725
MEM_MISO: DD1.134 DD2.2 | length 7.5
  Top Layer w0.3: DD1.134@79.525,61.575 82.575,61.575 83.6,62.6 83.6,63.675 84.25,64.325 85.075,64.325 DD2.2@85.225,64.475
MEM_MOSI: DD1.135 DD2.5 | length 14.7
  Top Layer w0.3: v1(78.05,62.075) DD1.135@79.525,62.075
  Top Layer w0.5: v1(89.825,61.925) DD2.5@91.225,61.925
  Bottom Layer w0.3: v1(78.05,62.075) 78.077,62.075 78.227,61.925 v1(89.825,61.925)
MEM_SCLK: DD1.133 DD2.6 | length 18.1
  Top Layer w0.3: DD1.133@79.525,61.075 82.525,61.075 83.9,59.7 91.65,59.7 92.825,60.875 92.825,62.875 92.525,63.175 DD2.6@91.225,63.175
MP_EN_HW: R77.2 R85.1 XP14.11 | length 17
  Top Layer w0.3: XP14.11@3.6,30.5 6.525,33.425 13.75,33.425 14.975,32.2 R77.2@17.35,32.2
  Top Layer w0.5: R77.2@17.35,32.2 R85.1@17.35,33.7
NetC15_1: C15.1 DD1.71 | length 2.4
  Top Layer w0.3: C15.1@55.7,49.575 DD1.71@58.075,49.575
NetC24_1: C24.1 DD1.106 | length 3.3
  Top Layer w0.3: DD1.106@76.55,47.1 76.55,45.275 76.95,44.875 C24.1@77.825,44.875
NetC29A1_2: C29A1.2 DA3A1.3 R9A1.1 | length 4.1
  Top Layer w0.5: C29A1.2@10.3,100.075 11.8,100.075 12.35,100.625 DA3A1.3@14.2,100.625
NetC29A2_2: C29A2.2 DA3A2.3 R9A2.1 | length 4.3
  Top Layer w0.5: C29A2.2@10.3,87.175 11.8,87.175 R9A2.1@12,87.375 ; R9A2.1@11.9,87.275 12.35,87.725 DA3A2.3@14.2,87.725
NetC29A3_2: C29A3.2 DA3A3.3 R9A3.1 | length 4.3
  Top Layer w0.5: C29A3.2@10.3,74.275 11.8,74.275 R9A3.1@12,74.475 ; R9A3.1@11.9,74.375 12.35,74.825 DA3A3.3@14.2,74.825
NetC29A4_2: C29A4.2 DA3A4.3 R9A4.1 | length 4.1
  Top Layer w0.5: C29A4.2@37.1,100.075 38.6,100.075 39.15,100.625 DA3A4.3@41,100.625
NetC29A5_2: C29A5.2 DA3A5.3 R9A5.1 | length 4.1
  Top Layer w0.5: C29A5.2@37.1,87.175 38.6,87.175 39.15,87.725 DA3A5.3@41,87.725
NetC29A6_2: C29A6.2 DA3A6.3 R9A6.1 | length 4.1
  Top Layer w0.5: C29A6.2@37.1,74.275 38.6,74.275 39.15,74.825 DA3A6.3@41,74.825
NetC30A1_1: C30A1.1 DA3A1.1 R10A1.1 | length 4.8
  Top Layer w0.5: C30A1.1@10.3,103.975 11.8,103.975 R10A1.1@12,104.175 13.875,104.175 14.168,103.882 14.168,103.207 DA3A1.1@14.2,103.175
NetC30A2_1: C30A2.1 DA3A2.1 R10A2.1 | length 4.8
  Top Layer w0.5: C30A2.1@10.3,91.075 11.8,91.075 R10A2.1@12,91.275 13.907,91.275 14.2,90.982 DA3A2.1@14.2,90.275
NetC30A3_1: C30A3.1 DA3A3.1 R10A3.1 | length 4.8
  Top Layer w0.5: C30A3.1@10.3,78.175 11.8,78.175 R10A3.1@12,78.375 13.907,78.375 14.2,78.082 DA3A3.1@14.2,77.375
NetC30A4_1: C30A4.1 DA3A4.1 R10A4.1 | length 4.8
  Top Layer w0.5: C30A4.1@37.1,103.975 38.6,103.975 R10A4.1@38.8,104.175 40.7,104.175 40.993,103.882 40.993,103.182 DA3A4.1@41,103.175
NetC30A5_1: C30A5.1 DA3A5.1 R10A5.1 | length 4.8
  Top Layer w0.5: C30A5.1@37.1,91.075 38.6,91.075 R10A5.1@38.8,91.275 40.707,91.275 41,90.982 DA3A5.1@41,90.275
NetC30A6_1: C30A6.1 DA3A6.1 R10A6.1 | length 4.8
  Top Layer w0.5: C30A6.1@37.1,78.05 C30A6.1@37.2,78.15 ; C30A6.1@37.2,78.275 38.7,78.275 R10A6.1@38.8,78.375 40.707,78.375 41,78.082 DA3A6.1@41,77.375
NetC34A1_1: C34A1.1 DA4A1.1 R14A1.2 | length 2.9
  Top Layer w0.5: R14A1.2@22.125,101.575 22.15,101.6 22.15,102.975 C34A1.1@22.175,103 DA4A1.1@23.65,103
NetC34A2_1: C34A2.1 DA4A2.1 R14A2.2 | length 2.9
  Top Layer w0.5: R14A2.2@22.125,88.65 22.15,88.675 22.15,90.05 C34A2.1@22.175,90.075 DA4A2.1@23.675,90.075
NetC34A3_1: C34A3.1 DA4A3.1 R14A3.2 | length 2.9
  Top Layer w0.5: R14A3.2@22.125,75.75 22.15,75.775 22.15,77.175 C34A3.1@22.175,77.2 DA4A3.1@23.65,77.2
NetC34A4_1: C34A4.1 DA4A4.1 R14A4.2 | length 3
  Top Layer w0.5: R14A4.2@48.925,101.575 48.95,101.6 48.95,102.975 C34A4.1@48.975,103 48.988,102.987 50.463,102.987 DA4A4.1@50.475,102.975
NetC34A5_1: C34A5.1 DA4A5.1 R14A5.2 | length 3
  Top Layer w0.5: R14A5.2@48.925,88.65 48.95,88.675 48.95,90.075 C34A5.1@48.975,90.1 ; C34A5.1@48.95,90.1 50.45,90.1 DA4A5.1@50.475,90.075
NetC34A6_1: C34A6.1 DA4A6.1 R14A6.2 | length 2.9
  Top Layer w0.5: R14A6.2@48.925,75.75 48.95,75.775 48.95,77.175 C34A6.1@48.975,77.2 ; C34A6.1@49,77.175 DA4A6.1@50.475,77.175
NetC38_1: C38.1 DA5.3 R19.2 | length 3.3
  Top Layer w0.5: DA5.3@132.35,90.35 132.3,90.3 R19.2@132.3,88.65 C38.1@133.9,88.65
NetC41_1: C41.1 DA6.1 R22.1 | length 3.8
  Top Layer w0.5: R22.1@130.7,99.2 C41.1@132.65,99.2 132.65,97.675 132.525,97.55 DA6.1@132.35,97.55
NetC41_2: C41.2 DA6.4 R23.1 | length 6.8
  Top Layer w0.3: C41.2@134.2,99.2 133.925,98.925 133.925,98.65 133.425,98.15 133.425,96.175 133.825,95.775 134.375,95.775 DA6.4@134.5,95.65
  Top Layer w0.5: C41.2@134.2,99.2 R23.1@136.4,99.2
NetC42_1: C42.1 DD3.2 R26.2 R27.1 | length 6.4
  Bottom Layer w0.3: DD3.2@139.5,85.025 140.375,85.025 140.882,85.532 141.307,85.532 C42.1@141.575,85.8 141.525,85.8 141.25,86.075 141.25,86.35 140.994,86.606 140.526,86.606 140.35,86.782 140.35,87.2 R26.2@140.075,87.475
  Bottom Layer w0.5: R27.1@138.7,87.475 R26.2@140.075,87.475
NetC52A13_1: C52A13.1 DA10A13.3 R28A13.2 | length 4.8
  Top Layer w0.5: R28A13.2@51.3,13.025 C52A13.1@51.3,11.525 51.3,10.4 51.85,9.85 53.175,9.85 DA10A13.3@53.2,9.825
NetC52A14_1: C52A14.1 DA10A14.3 R28A14.2 | length 4.8
  Top Layer w0.5: R28A14.2@76.875,13.025 C52A14.1@76.875,11.525 76.875,10.375 77.425,9.825 DA10A14.3@78.8,9.825
NetC52A15_1: C52A15.1 DA10A15.3 R28A15.2 | length 4.8
  Top Layer w0.5: R28A15.2@102.5,13.025 C52A15.1@102.5,11.525 102.5,10.425 103.075,9.85 104.4,9.85 DA10A15.3@104.425,9.825
NetC52A16_1: C52A16.1 DA10A16.3 R28A16.2 | length 4.8
  Top Layer w0.5: R28A16.2@128.125,13.025 C52A16.1@128.125,11.525 128.125,10.3 128.6,9.825 DA10A16.3@130.05,9.825
NetC63_1: C63.1 DA12.3 R31.2 | length 3.7
  Top Layer w0.5: DA12.3@108.125,100.913 108.1,100.887 108.1,99.743 108.393,99.45 108.625,99.45 108.78,99.295 C63.1@108.78,99.205 ; R31.2@108.8,97.7 C63.1@108.8,99.225
NetC71_1: C71.1 DA14.3 R36.2 | length 3.8
  Bottom Layer w0.5: R36.2@90.025,97.525 90.012,97.538 90.012,99.213 C71.1@90,99.225 90,99.275 90.175,99.45 90.357,99.45 90.65,99.743 DA14.3@90.65,100.913
NetC75_1: C75.1 DD11.2 R40.2 R43.1 | length 6.3
  Bottom Layer w0.3: DD11.2@139.5,69.275 139.524,69.299 140.374,69.299 140.85,69.775 141.25,69.775 141.5,70.025 C75.1@141.5,70.05 ; R40.2@140.075,71.725 140.35,71.45 140.35,71.1 140.59,70.86 141.074,70.86 141.25,70.684 141.25,70.325 141.525,70.05 C75.1@141.575,70.05
  Bottom Layer w0.5: R43.1@138.7,71.725 R40.2@140.075,71.725
NetC76_1: C76.1 DD12.2 R41.2 R44.1 | length 6.4
  Bottom Layer w0.3: DD12.2@139.5,74.525 140.375,74.525 140.875,75.025 141.3,75.025 C76.1@141.575,75.3 141.525,75.3 141.25,75.575 141.25,75.899 141.038,76.112 140.563,76.112 140.35,76.325 140.35,76.7 R41.2@140.075,76.975
  Bottom Layer w0.5: R44.1@138.7,76.975 R41.2@140.075,76.975
NetC77_1: C77.1 DD13.2 R42.2 R45.1 | length 6.4
  Bottom Layer w0.3: DD13.2@139.5,79.775 140.375,79.775 140.875,80.275 141.3,80.275 C77.1@141.575,80.55 141.525,80.55 141.25,80.825 141.25,81.199 141.074,81.375 140.526,81.375 140.35,81.551 140.35,81.95 R42.2@140.075,82.225
  Bottom Layer w0.5: R45.1@138.7,82.225 R42.2@140.075,82.225
NetC87_1: C87.1 XS1.13 XS1.14 | length 19.5
  Top Layer w0.5: XS1.13@149.275,48.382 150.5,49.607 150.5,62.997 XS1.14@149.275,64.222
  Top Layer w1: XS1.14@149.275,64.222 C87.1@149.275,66.85
NetC89_1: C89.1 R54.2 R55.2 | length 8.1
  Top Layer w0.3: R54.2@139.778,50.25 R54.2@139.8,50.228
  Top Layer w0.5: v1(138.775,50.25) R54.2@139.778,50.25 ; v1(138.775,54.75) 139.778,54.75 R55.2@139.8,54.728 C89.1@139.8,56.228
  Bottom Layer w0.5: v1(138.775,50.25) v1(138.775,54.75)
NetC90_1: C90.1 R56.2 R57.2 | length 8.1
  Top Layer w0.3: R56.2@139.775,58.45 R56.2@139.8,58.475
  Top Layer w0.5: v1(138.775,58.45) R56.2@139.775,58.45 ; v1(138.775,62.95) 139.775,62.95 R57.2@139.8,62.975 C90.1@139.8,64.475
  Bottom Layer w0.5: v1(138.775,58.45) v1(138.775,62.95)
NetC94_1: C94.1 R67.2 ZQ3.3 | length 3.6
  Top Layer w0.3: ZQ3.3@130.9,68.2 ZQ3.3@131.088,68.388 ; ZQ3.3@131.05,68.35 ZQ3.3@131.125,68.425
  Top Layer w0.5: R67.2@129.375,68.2 ZQ3.3@130.9,68.2 ; ZQ3.3@131.125,68.425 C94.1@131.125,70.15
NetC104_1: C104.1 DD16.3 | length 3.1
  Top Layer w0.3: DD16.3@14.5,45.2 16.15,45.2 16.601,45.651 C104.1@17.401,45.651
NetC106_1: C106.1 DD16.9 | length 3.4
  Top Layer w0.3: DD16.9@9.9,44.7 11,44.7 11.45,44.25 C106.1@11.45,42.6
NetC106_2: C106.2 DD16.2 | length 3.3
  Top Layer w0.3: C106.2@13,42.6 13,44.225 13.475,44.7 DD16.2@14.5,44.7
NetC107_1: C107.1 DA18.1 R88.1 | length 5.9
  Top Layer w0.3: DA18.1@11.15,64.65 11.275,64.525 11.825,64.525 12.65,63.7 14,63.7 14.75,64.45 C107.1@14.8,64.45
  Top Layer w0.5: C107.1@14.8,64.45 R88.1@16.3,64.45
NetC107_2: C107.2 DA18.4 R90.1 U9.4 | length 10.6
  Top Layer w0.5: DA18.4@13.3,62.75 13.325,62.775 14.675,62.775 C107.2@14.8,62.9 14.795,62.9 14.62,62.725 14.62,62.12 14.405,61.905 14.405,61.325 R90.1@14.23,61.15 ; R90.1@14.2,61.15 14.405,61.15 15.375,61.15 15.925,60.6 15.925,58.95 17.075,57.8 U9.4@18.875,57.8
NetC120_1: C120.1 DA22.3 R104.2 | length 6.9
  Top Layer w0.3: DA22.3@15.45,50.175 DA22.3@15.575,50.3
  Top Layer w0.5: C120.1@11.8,48.6 11.8,48.55 11.975,48.375 14.9,48.375 15.45,48.925 DA22.3@15.45,50.175 ; DA22.3@15.575,50.3 R104.2@17,50.3
NetC126A25_1: C126A25.1 DA23A25.3 R117A25.2 | length 3
  Top Layer w0.3: C126A25.1@82.325,101.875 C126A25.1@82.375,101.825
  Top Layer w0.5: v1(80.975,102.725) R117A25.2@80.975,101.875 C126A25.1@82.325,101.875
  Bottom Layer w0.3: DA23A25.3@80.935,102.036 DA23A25.3@80.975,102.076
  Bottom Layer w0.5: DA23A25.3@80.975,102.076 v1(80.975,102.725)
NetC126A26_1: C126A26.1 DA23A26.3 R117A26.2 | length 2.9
  Top Layer w0.5: R117A26.2@69,101.875 70.35,101.875 C126A26.1@70.4,101.825 ; R117A26.2@69,101.95 69.025,101.975 v1(69.025,102.725)
  Bottom Layer w0.3: DA23A26.3@69,102.036 69.025,102.061 v1(69.025,102.725)
NetDA3A1_6: DA3A1.6 R11A1.1 | length 2.2
  Top Layer w0.5: DA3A1.6@20.2,100.625 20.25,100.575 21.233,100.575 21.5,100.308 21.95,100.308 22.125,100.133 R11A1.1@22.125,100.083
NetDA3A2_6: DA3A2.6 R11A2.1 | length 2.2
  Top Layer w0.5: DA3A2.6@20.2,87.725 20.25,87.675 21.226,87.675 21.518,87.383 21.95,87.383 21.95,87.333 R11A2.1@22.125,87.158
NetDA3A3_6: DA3A3.6 R11A3.1 | length 2.2
  Top Layer w0.5: DA3A3.6@20.2,74.825 20.25,74.775 21.25,74.775 21.55,74.475 21.95,74.475 22.109,74.316 R11A3.1@22.109,74.242
NetDA3A4_6: DA3A4.6 R11A4.1 | length 2.3
  Top Layer w0.5: DA3A4.6@47,100.625 47.05,100.575 48.05,100.575 48.317,100.308 48.75,100.308 48.863,100.195 R11A4.1@48.863,99.975
NetDA3A5_6: DA3A5.6 R11A5.1 | length 2.2
  Top Layer w0.5: DA3A5.6@47,87.725 47.05,87.675 48.025,87.675 48.325,87.375 48.75,87.375 48.75,87.325 R11A5.1@48.925,87.15
NetDA3A6_6: DA3A6.6 R11A6.1 | length 2.2
  Top Layer w0.5: DA3A6.6@47,74.825 47.05,74.775 48.05,74.775 48.35,74.475 48.75,74.475 48.925,74.3 R11A6.1@48.925,74.225
NetDA4A1_3: DA4A1.3 R15A1.2 R16A1.2 | length 8.3
  Top Layer w0.5: DA4A1.3@25.575,102.975 R16A1.2@29.375,102.975 ; R16A1.2@29.375,101.675 30.125,102.425 R16A1.2@30.125,102.475 30.425,102.775 R15A1.2@33.425,102.775
NetDA4A2_3: DA4A2.3 R15A2.2 R16A2.2 | length 8.4
  Top Layer w0.5: DA4A2.3@25.575,90.075 25.575,90.375 25.6,90.4 R16A2.2@29.825,90.4 ; R16A2.2@29.825,89.275 30.425,89.875 R15A2.2@33.425,89.875
NetDA4A3_3: DA4A3.3 R15A3.2 R16A3.2 | length 9.3
  Top Layer w0.5: DA4A3.3@25.575,77.175 R16A3.2@29.775,77.175 ; R16A3.2@29.548,77.518 R16A3.2@30.058,77.008 ; R16A3.2@29.775,76.2 R16A3.2@30.325,76.75 ; R16A3.2@30.125,76.675 30.125,77 33.4,77 R15A3.2@33.425,76.975
NetDA4A4_3: DA4A4.3 R15A4.2 R16A4.2 | length 8.3
  Top Layer w0.5: DA4A4.3@52.375,102.975 R16A4.2@56.175,102.975 ; R16A4.2@56.175,101.675 56.925,102.425 R16A4.2@56.925,102.475 57.225,102.775 R15A4.2@60.225,102.775
NetDA4A5_3: DA4A5.3 R15A5.2 R16A5.2 | length 8.2
  Top Layer w0.5: DA4A5.3@52.375,90.075 R16A5.2@56.3,90.075 ; R16A5.2@56.3,88.95 R16A5.2@56.925,89.575 57.225,89.875 R15A5.2@60.225,89.875
NetDA4A6_3: DA4A6.3 R15A6.2 R16A6.2 | length 9.3
  Top Layer w0.5: DA4A6.3@52.375,77.175 R16A6.2@56.475,77.175 ; R16A6.2@56.175,77.525 56.925,76.775 R16A6.2@56.925,76.675 ; R16A6.2@56.475,76.225 R16A6.2@56.925,76.675 ; R15A6.2@60.225,76.975 57.225,76.975 57.075,76.825 R16A6.2@56.925,76.675
NetDA5_1: DA5.1 DA5.4 R20.1 | length 6.2
  Top Layer w0.3: R20.1@130.75,93.95 131.025,93.675 131.025,93.3 131.325,93 131.55,93 131.9,92.65 131.9,92.375 132.15,92.125 133.049,92.125 133.425,91.749 133.425,90.825 133.775,90.475 134.375,90.475 DA5.4@134.5,90.35
NetDA6_3: DA6.3 R20.2 R21.1 | length 3.3
  Top Layer w0.5: DA6.3@132.35,95.65 132.3,95.6 R20.2@132.3,93.95 R21.1@133.9,93.95
NetDA7A13_4: DA7A13.4 DD4A13.4 | length 2.9
  Top Layer w0.3: DA7A13.4@50.93,27.88 DA7A13.4@50.95,27.9
  Top Layer w0.5: DD4A13.4@50.93,25.025 DA7A13.4@50.93,27.88
NetDA7A14_4: DA7A14.4 DD4A14.4 | length 2.9
  Top Layer w0.5: DD4A14.4@76.565,25.025 76.57,25.03 76.57,27.895 DA7A14.4@76.575,27.9
NetDA7A15_4: DA7A15.4 DD4A15.4 | length 2.9
  Top Layer w0.5: DA7A15.4@102.2,27.9 102.203,27.898 102.203,25.027 DD4A15.4@102.205,25.025
NetDA7A16_4: DA7A16.4 DD4A16.4 | length 2.9
  Top Layer w0.5: DD4A16.4@127.835,25.025 DA7A16.4@127.835,27.89
NetDA10A13_1: DA10A13.1 DA10A13.4 XP7A13.5 | length 11.7
  Top Layer w0.3: XP7A13.5@49.775,3.625 50.775,2.625 52.4,2.625 53.2,3.425 DA10A13.4@53.2,7.675 ; DA10A13.4@53.325,7.8 53.325,8.35 53.7,8.725 54.55,8.725 54.975,9.15 54.975,9.7 DA10A13.1@55.1,9.825
NetDA10A14_1: DA10A14.1 DA10A14.4 XP7A14.5 | length 11.9
  Top Layer w0.3: XP7A14.5@75.5,3.625 76.525,2.6 78.2,2.6 78.8,3.2 DA10A14.4@78.8,7.675 78.925,7.8 78.925,8.35 79.3,8.725 80.15,8.725 80.575,9.15 80.575,9.7 DA10A14.1@80.7,9.825
NetDA10A15_1: DA10A15.1 DA10A15.4 XP7A15.5 | length 11.9
  Top Layer w0.3: XP7A15.5@101.125,3.625 102.125,2.625 103.925,2.625 104.425,3.125 DA10A15.4@104.425,7.675 104.55,7.8 104.55,8.4 104.875,8.725 105.775,8.725 106.2,9.15 106.2,9.7 DA10A15.1@106.325,9.825
NetDA10A16_1: DA10A16.1 DA10A16.4 XP7A16.5 | length 11.8
  Top Layer w0.3: XP7A16.5@126.75,3.625 127.775,2.6 129.375,2.6 130.05,3.275 DA10A16.4@130.05,7.675 130.175,7.8 130.175,8.35 130.55,8.725 131.4,8.725 131.825,9.15 131.825,9.7 DA10A16.1@131.95,9.825
NetDA12_1: DA12.1 DA12.4 XP8.5 | length 11.9
  Top Layer w0.3: DA12.4@110.275,100.913 110.15,101.038 109.5,101.038 109.225,101.312 109.225,102.363 108.9,102.688 108.25,102.688 DA12.1@108.125,102.813 108.45,102.813 108.575,102.938 108.575,103.263 109.512,104.2 112.637,104.2 XP8.5@114.825,106.388
NetDA14_1: DA14.1 DA14.4 XP9.5 | length 7.4
  Bottom Layer w0.3: DA14.4@88.5,100.913 88.625,101.038 89.163,101.038 89.6,101.475 89.6,102.3 89.988,102.688 90.525,102.688 DA14.1@90.65,102.813 90.65,105.375 XP9.5@91.65,106.375
NetDA18_3: DA18.3 R74.2 R78.1 | length 3.1
  Top Layer w0.5: DA18.3@11.15,62.75 11.175,62.75 11.2,62.725 R74.2@11.2,61.15 R78.1@12.7,61.15
NetDA19_1: DA19.1 DA19.4 R95.1 | length 5.2
  Top Layer w0.3: DA19.1@34.95,61.2 DA19.1@35.125,61.2 ; DA19.1@35.075,61.075 35.65,61.075 36.05,60.675 36.05,59.825 36.45,59.425 36.975,59.425 DA19.4@37.1,59.3
  Top Layer w0.5: DA19.1@34.95,61.2 35.225,61.2 35.25,61.225 R95.1@35.25,62.725
NetDA19_3: DA19.3 R94.1 U9.5 | length 6.8
  Top Layer w0.5: U9.5@30.15,57.8 R94.1@35.25,57.8 35.25,59.175 35.125,59.3 DA19.3@34.95,59.3
NetDA22_4: DA22.4 R110.2 R114.1 | length 2.8
  Top Layer w0.5: DA22.4@15.45,52.15 15.45,53.7 15.55,53.8 R110.2@16.7,53.8
NetDA23A25_1: DA23A25.1 DA23A25.4 XP15A25.6 | length 11.2
  Bottom Layer w0.3: XP15A25.6@79.625,108.375 80.625,107.375 80.625,105.25 83.085,102.79 DA23A25.4@83.085,102.036 82.96,101.911 82.411,101.911 82.025,101.525 82.025,100.675 81.611,100.261 81.06,100.261 DA23A25.1@80.935,100.136
NetDA23A26_1: DA23A26.1 DA23A26.4 XP15A26.6 | length 11.2
  Bottom Layer w0.3: XP15A26.6@67.625,108.375 68.625,107.375 68.625,105.275 71.15,102.75 DA23A26.4@71.15,102.036 DA23A26.4@70.825,102.036 ; DA23A26.1@69,100.136 69.125,100.261 69.661,100.261 70.1,100.7 70.1,101.525 70.486,101.911 DA23A26.4@70.825,101.911
NetDD1_48: DD1.48 R3.1 | length 2.9
  Top Layer w0.3: DD1.48@58.075,61.075 v1(59.55,61.075)
  Bottom Layer w0.5: v1(59.55,61.075) 59.601,61.075 59.876,60.8 R3.1@60.9,60.8
NetDD1_138: DD1.138 R7.1 | length 2.2
  Top Layer w0.3: DD1.138@79.525,63.575 80.1,63.575 R7.1@81.7,63.575
NetDD1_143: DD1.143 R8.1 | length 2.3
  Top Layer w0.3: DD1.143@79.525,66.075 80.841,66.075 80.978,66.211 81.386,66.211 R8.1@81.65,66.475
NetDD4A13_12: DD4A13.12 R28A13.1 | length 2.4
  Top Layer w0.5: DD4A13.12@49.66,15.425 49.66,13.115 R28A13.1@49.75,13.025
NetDD4A13_13: DD4A13.13 XP7A13.4 | length 19
  Top Layer w0.5: v1(50.925,17) 50.928,16.997 50.928,15.427 DD4A13.13@50.93,15.425
  Bottom Layer w0.3: XP7A13.4@47.775,1.625 46.9,2.5 46.9,12.975 v1(50.925,17)
NetDD4A13_14: DD4A13.14 XP7A13.3 | length 16.8
  Top Layer w0.5: DD4A13.14@52.2,15.425 v1(52.2,17)
  Bottom Layer w0.3: XP7A13.3@47.775,3.625 47.775,12.575 v1(52.2,17)
NetDD4A14_12: DD4A14.12 R28A14.1 | length 2.4
  Top Layer w0.5: DD4A14.12@75.295,15.425 75.295,13.08 R28A14.1@75.35,13.025
NetDD4A14_13: DD4A14.13 XP7A14.4 | length 19.1
  Top Layer w0.3: DD4A14.13@76.565,15.425 DD4A14.13@76.57,15.43 ; v1@76.57,16.995 v1(76.575,17)
  Top Layer w0.5: DD4A14.13@76.57,15.43 v1@76.57,16.995
  Bottom Layer w0.3: XP7A14.4@73.5,1.625 72.5,2.625 72.5,12.925 v1(76.575,17)
NetDD4A14_14: DD4A14.14 XP7A14.3 | length 16.7
  Top Layer w0.3: v1(77.825,17) v1@77.83,16.995 ; DD4A14.14@77.83,15.43 DD4A14.14@77.835,15.425
  Top Layer w0.5: DD4A14.14@77.83,15.43 v1@77.83,16.995
  Bottom Layer w0.3: XP7A14.3@73.5,3.625 73.5,12.675 v1(77.825,17)
NetDD4A15_12: DD4A15.12 R28A15.1 | length 2.4
  Top Layer w0.3: DD4A15.12@100.935,15.425 DD4A15.12@100.943,15.418 ; R28A15.1@100.943,13.033 R28A15.1@100.95,13.025
  Top Layer w0.5: R28A15.1@100.943,13.033 DD4A15.12@100.943,15.418
NetDD4A15_13: DD4A15.13 XP7A15.4 | length 19
  Top Layer w0.3: v1(102.2,17) v1@102.202,16.997 ; DD4A15.13@102.202,15.428 DD4A15.13@102.205,15.425
  Top Layer w0.5: DD4A15.13@102.202,15.428 v1@102.202,16.997
  Bottom Layer w0.3: XP7A15.4@99.125,1.625 98.15,2.6 98.15,12.95 v1(102.2,17)
NetDD4A15_14: DD4A15.14 XP7A15.3 | length 16.8
  Top Layer w0.5: DD4A15.14@103.475,15.425 v1(103.475,17)
  Bottom Layer w0.3: XP7A15.3@99.125,3.625 99.125,12.65 v1(103.475,17)
NetDD4A16_12: DD4A16.12 R28A16.1 | length 2.4
  Top Layer w0.5: DD4A16.12@126.565,15.425 126.57,15.42 126.57,13.03 R28A16.1@126.575,13.025
NetDD4A16_13: DD4A16.13 XP7A16.4 | length 19.1
  Top Layer w0.5: v1(127.825,17) 127.83,16.995 127.83,15.43 DD4A16.13@127.835,15.425
  Bottom Layer w0.3: XP7A16.4@124.75,1.625 123.75,2.625 123.75,12.925 v1(127.825,17)
NetDD4A16_14: DD4A16.14 XP7A16.3 | length 16.8
  Top Layer w0.5: v1(129.1,17) 129.103,16.997 129.103,15.428 DD4A16.14@129.105,15.425
  Bottom Layer w0.3: XP7A16.3@124.75,3.625 124.75,12.65 v1(129.1,17)
NetDD5A13_2: DD5A13.2 R29A13.2 XP7A13.6 | length 17.8
  Top Layer w0.3: DD5A13.2@41.1,15.425 41.1,14.025 42.275,12.85 43.2,12.85 43.775,12.275 R29A13.2@43.775,11.525 ; R29A13.2@43.775,11.35 43.775,9.85 48.9,4.725 48.9,2.5 XP7A13.6@49.775,1.625
NetDD5A13_3: DD5A13.3 R30A13.2 XP7A13.7 | length 16.6
  Top Layer w0.3: DD5A13.3@42.4,15.425 42.4,14.025 42.85,13.575 44.3,13.575 45.55,12.325 45.55,11.55 R30A13.2@45.575,11.525 45.575,9.95 XP7A13.7@51.9,3.625
NetDD5A14_2: DD5A14.2 R29A14.2 XP7A14.6 | length 18.1
  Top Layer w0.3: DD5A14.2@66.725,15.425 66.725,13.875 67.75,12.85 68.825,12.85 69.4,12.275 69.4,9.85 74.5,4.75 74.5,3.211 74.5,2.625 XP7A14.6@75.5,1.625
NetDD5A14_3: DD5A14.3 R30A14.2 XP7A14.7 | length 16.6
  Top Layer w0.3: DD5A14.3@68.025,15.425 68.025,13.975 68.325,13.675 69.9,13.675 71.2,12.375 71.2,9.925 XP7A14.7@77.5,3.625
NetDD5A15_2: DD5A15.2 R29A15.2 XP7A15.6 | length 18
  Top Layer w0.3: DD5A15.2@92.375,15.425 92.375,13.95 93.55,12.775 94.575,12.775 95.05,12.3 95.05,9.825 100.125,4.75 100.125,2.625 XP7A15.6@101.125,1.625
NetDD5A15_3: DD5A15.3 R30A15.2 XP7A15.7 | length 16.6
  Top Layer w0.3: DD5A15.3@93.675,15.425 93.675,14.025 94.075,13.625 95.65,13.625 96.85,12.425 R30A15.2@96.85,11.525 96.85,9.9 XP7A15.7@103.125,3.625
NetDD5A16_2: DD5A16.2 R29A16.2 XP7A16.6 | length 18.1
  Top Layer w0.3: DD5A16.2@118,15.425 118,13.875 118.975,12.9 120.075,12.9 120.675,12.3 120.675,11.55 R29A16.2@120.65,11.525 120.65,9.825 125.75,4.725 125.75,2.625 XP7A16.6@126.75,1.625
NetDD5A16_3: DD5A16.3 R30A16.2 XP7A16.7 | length 16.6
  Top Layer w0.3: DD5A16.3@119.3,15.425 119.3,14.1 119.7,13.7 121.175,13.7 122.5,12.375 122.5,11.55 R30A16.2@122.475,11.525 122.475,9.9 XP7A16.7@128.75,3.625
NetDD6_3: DD6.3 R32.2 XP8.1 | length 9.6
  Top Layer w0.3: R32.2@118.6,100.75 118.875,101.025 118.875,101.55 119.375,102.05 119.375,104.2 118.825,104.75 XP8.1@118.825,106.375
  Top Layer w0.5: R32.2@118.6,100.75 118.735,100.615 DD6.3@118.735,97.428
NetDD6_4: DD6.4 R34.2 XP8.2 | length 12.4
  Top Layer w0.3: DD6.4@117.465,97.428 117.465,101.915 117.982,102.432 118.325,102.432 118.6,102.707 118.6,103.8 117.825,104.575 117.825,107.375 XP8.2@118.825,108.375